# Altium PCB PCB1.PcbDoc
Units mm, origin at the board's own origin, x right, y up, seen from the top; angles counter-clockwise.
Board outline 42.5 x 32.75 mm, 4 copper layers (Top Layer, Int1 (GND), Int2 (PWR), Bottom Layer), stack 1.57 mm thick; 35 components, 26 nets, 170 pads, 29 vias.
Unrouted connection lines stored in the file: 88.
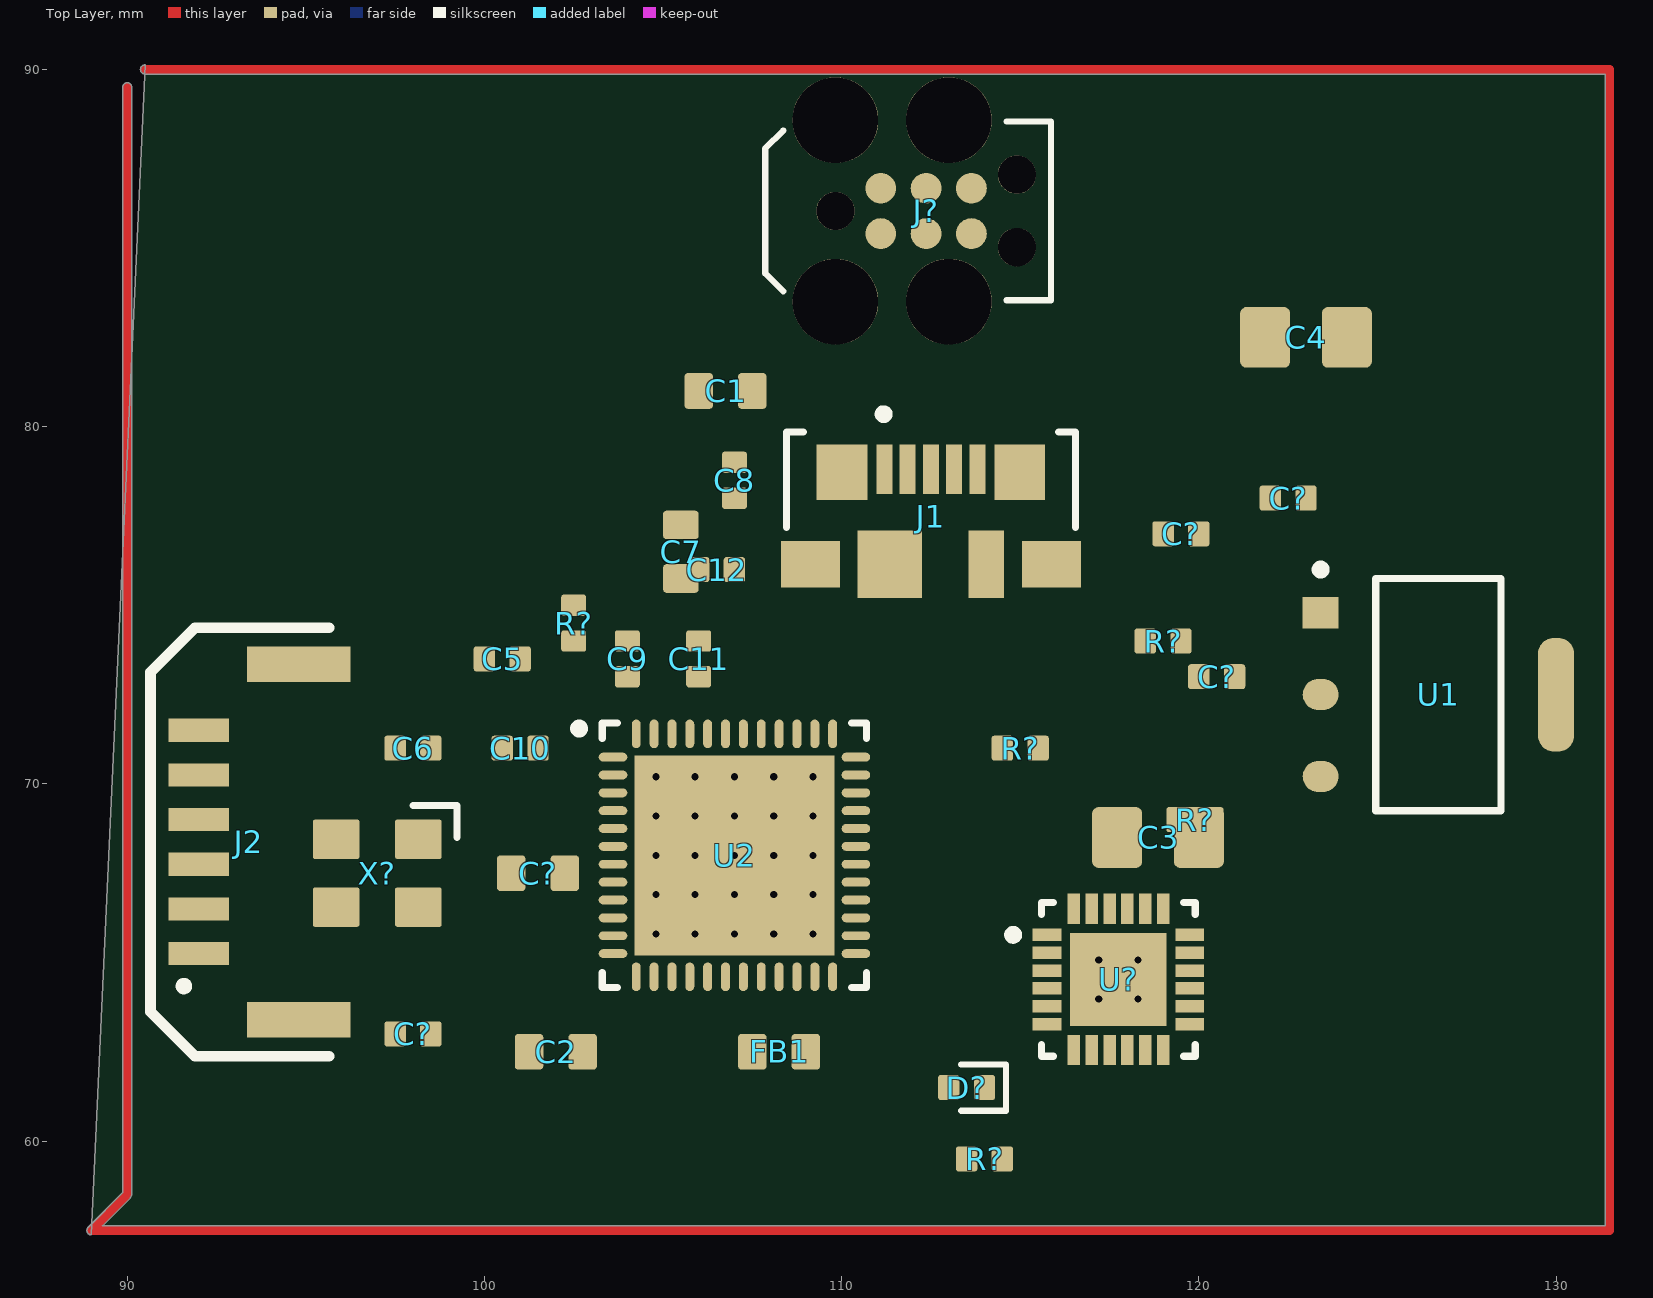
[diagram p0: Top Layer view]
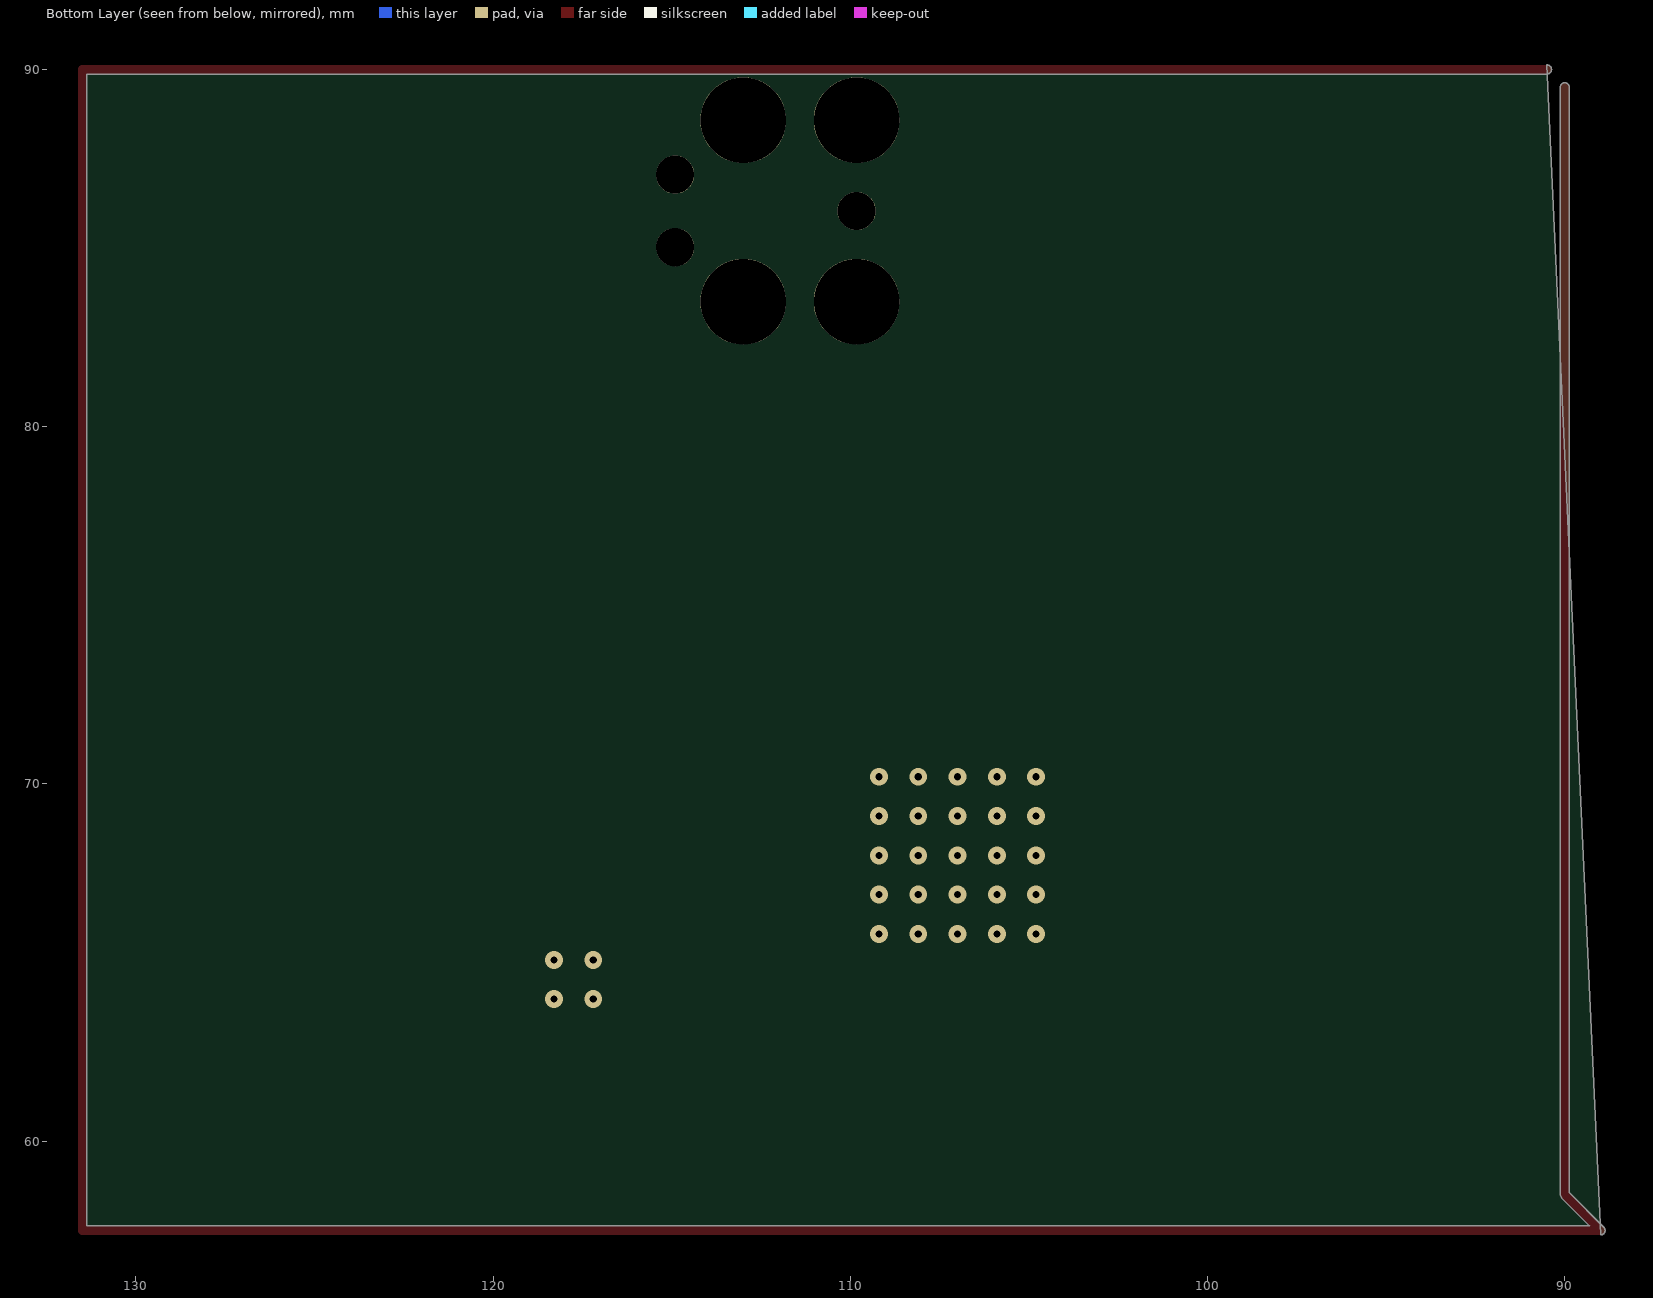
[diagram p1: Bottom Layer view, seen from below]

## Layer stack, top to bottom
Top Solder: solder mask 0.0254, SM-001, Dk 4
Top Layer: signal copper 0.035
Dielectric 1: prepreg 0.2, PP-017, Dk 4.6
Int1 (GND): signal copper 0.0175
Dielectric 3: core 1.065, Core-039, Dk 4.6
Int2 (PWR): signal copper 0.0175
Dielectric 5: prepreg 0.2, PP-017, Dk 4.6
Bottom Layer: signal copper 0.035
Bottom Solder: solder mask 0.0254, SM-001, Dk 4

## Board outline
89,57.373 cw(c89,57.5) 88.91,57.59 89.873,58.553 89.873,89.5 cw(c90,89.5) 90.127,89.5 90.127,58.5 90.09,58.41 89.308,57.627 131.373,57.627 131.373,89.873 90.5,89.873 cw(c90.5,90) 90.5,90.127

## Design rules (kind name [scope] priority, off if disabled: settings)
Clearance [All] p1: gap=0.2 ignorepadtopadclearanceinfootprint=FALSE
DiffPairsRouting [All] p1: maxlimit=0.254 minlimit=0.254 mostfreqgap=0.254 toplayer_minwidth=0.381 toplayer_maxwidth=0.381 toplayer_prefwidth=0.381 midlayer1_minwidth=0.381 midlayer1_maxwidth=0.381 midlayer1_prefwidth=0.381 midlayer2_minwidth=0.381 midlayer2_maxwidth=0.381 midlayer2_prefwidth=0.381 bottomlayer_minwidth=0.381 bottomlayer_maxwidth=0.381 bottomlayer_prefwidth=0.381 maxuncoupledlength=12.7
PolygonConnect [All] p1: connectstyle=Direct reliefconductorwidth=0.254 reliefentries=4 polygonreliefangle="90 Angle" airgapwidth=0.254
RoutingVias [All] p1: holewidth=0.711 width=1.27 viastyle="Through Hole" minholewidth=0.711 minwidth=1.27 maxholewidth=0.711 maxwidth=1.27
SolderMaskExpansion [All] p1: expansion=0 istentingtop=FALSE
SupplyNets "Schematic Supply Nets_4" [InNet('N000-1')] p1: voltage=0.000
SupplyNets "Schematic Supply Nets_3" [InNet('VCC')] p2: voltage=0.000
SupplyNets "Schematic Supply Nets_2" [InNet('GND')] p3: voltage=0.000
SupplyNets "Schematic Supply Nets_1" [InNet('+5')] p4: voltage=0.000
SupplyNets "Schematic Supply Nets" [InNet('3V3')] p5: voltage=0.000
UnRoutedNet [All] p1: checkbadconnections=TRUE
Width [All] p1: maxlimit=1 minlimit=0.2 preferedwidth=0.3 midlayer1_minwidth=0.254 midlayer1_maxwidth=0.254 midlayer1_prefwidth=0.254 midlayer2_minwidth=0.254 midlayer2_maxwidth=0.254 midlayer2_prefwidth=0.254 minimp=50.000000 maximp=50.000000 favimp=50.000000
28 further rules are at their usual default settings.

## Classes and differential pairs
differential pair USB_D: +USB_D_P -USB_D_N

## Components (designator, comment, footprint, x,y, rotation, side; value= is the part's Value field where it differs from the comment)
C1 "2u2" CAP_0603 106.75,81 r0 top
C2 "2u2" CAP_0603 102,62.5 r0 top
C3 "22u" CAP_0805 118.857,68.5 r0 top
C4 "22u" CAP_0805 123,82.5 r0 top
C5 "10P" CAP_0402 100.5,73.5 r0 top
C6 "10p" CAP_0402 98,71 r0 top
C7 "2u2" CAP_0603 105.5,76.5 r270 top
C8 "100n" CAP_0402 107,78.5 r90 top
C9 "100n" CAP_0402 104,73.5 r90 top
C10 "100n" CAP_0402 101,71 r0 top
C11 "100n" CAP_0402 106,73.5 r90 top
C12 "100n" CAP_0402 106.5,76 r180 top
C? "100n" CAP_0402 98,63 r0 top
C? "100n" CAP_0402 150.719,39.789 r0 top
C? "100n" CAP_0402 119.5,77 r0 top
C? "2u2" CAP_0603 101.5,67.5 r0 top
C? "10n" CAP_0402 122.5,78 r0 top
C? "2n2" CAP_0402 120.5,73 r0 top
D1 "GREEN" LED_0402_GREEN 160,54.5 r0 top
D? "RED" LED_0402_RED 113.5,61.5 r0 top
FB1 "120R" FB_0603 108.25,62.5 r0 top
J1 "473460001" FP-473460001-MFG 112.5,76.5 r0 top
J2 "SM06B-GHS-TB" SM06B-GHS-TB 93.4,68.375 r90 top
J? "TC2030" TC2030-FP 112.365,86.04 r0 top
R1 "1K" RES_0402 163.5,84 r0 top
R? "2K2" RES_0402 115,71 r0 top
R? "2K2" RES_0402 124.684,39.789 r0 top
R? "1K" RES_0402 119.889,69 r0 top
R? "10k" RES_0402 114,59.5 r0 top
R? "10k" RES_0402 119,74 r0 top
R? "0R" RES_0402 102.5,74.5 r90 top
U1 "AMS1117-3.3" FP-AMS1117-IPC_C 126.705,72.5 r0 top
U2 "STM32F411CEU6" STM-UFQFPN48_L 107,68 r0 top
U? "MPU-6050" IS-QFN-24_V 117.75,64.525 r0 top
X? "24MHz" XTAL_3225 97,67.5 r180 top

## Footprints (in the part's own frame and the unit in brackets; to place one, negate y for a bottom-side part, rotate by r counter-clockwise, add the part's x,y. Pads: shape width x height; smd on the part's side, far side on the other; paste and mask are expansions set on the pad)
CAP_0402 [mm]
  rrect25% 0.6x0.7 smd: 1(-0.5,0) 2(0.5,0)
  body extent -0.5,-0.26 0.5,0.26, height 0.37
CAP_0603 [mm]
  rrect25% 0.8x1 smd: 1(-0.75,0) 2(0.75,0)
  body extent -0.8,-0.4 0.8,0.4, height 0.51
CAP_0805 [mm]
  rrect25% 1.4x1.7 smd: 1(-1.143,0) 2(1.143,0)
  body extent -1.15,-0.76 1.15,0.79, height 1.01
FB_0603 [mm]
  rrect25% 0.8x1 smd: 1(-0.75,0) 2(0.75,0)
  body extent -0.8,-0.4 0.8,0.4, height 0.81
FP-473460001-MFG [mm]
  rect 0.45x1.38 smd paste+0 mask+0: 1(-1.3,2.31) 2(-0.65,2.31) 3(0,2.31) 4(0.65,2.31) 5(1.3,2.31)
  rect 1.425x1.55 smd paste+0 mask+0: 6(-2.488,2.225) 7(2.488,2.225)
  rect 1.65x1.3 smd paste+0 mask+0: 8(-3.375,-0.35) 11(3.375,-0.35)
  rect 1.8x1.9 smd paste+0 mask+0: 9(-1.15,-0.35)
  rect 1x1.9 smd paste+0 mask+0: 10(1.55,-0.35)
  silkscreen extent -4.05,0.67 4.05,3.97, body extent -4.3,-2.48 4.3,3.45, height 0.25
FP-AMS1117-IPC_C [mm]
  rect 1.004x0.872 smd paste+0 mask+0: 1(-3.295,2.29)
  rrect100% 1.004x0.872 smd paste+0 mask+0: 2(-3.295,0) 3(-3.295,-2.29)
  rrect87% 1.004x3.182 smd paste+0 mask+0: 4(3.295,0)
  silkscreen extent -3.42,-3.25 1.75,3.62, body extent -3.9,-3.35 3.9,3.35, height 0.25
IS-QFN-24_V [mm] "QFN, 24-Leads, Body 4x4mm, Pitch 0.5mm, Thermal Pad 2.7x2.6mm"
  rect 0.8x0.35 smd: 1(-2,1.25) 2(-2,0.75) 3(-2,0.25) 4(-2,-0.25) 5(-2,-0.75) 6(-2,-1.25) 13(2,-1.25) 14(2,-0.75) 15(2,-0.25) 16(2,0.25) 17(2,0.75) 18(2,1.25)
  rect 0.35x0.85 smd mask+0.102: 7(-1.25,-1.975) 8(-0.75,-1.975) 9(-0.25,-1.975) 10(0.25,-1.975) 11(0.75,-1.975) 12(1.25,-1.975) 19(1.25,1.975) 20(0.75,1.975) 21(0.25,1.975) 22(-0.25,1.975) 23(-0.75,1.975) 24(-1.25,1.975)
  rect 2.7x2.6 smd: 25(0,0)
  silkscreen extent -3.07,-2.15 2.15,2.15, body extent -2,-2 2,2, height 0.95
LED_0402_GREEN [mm]
  rrect25% 0.6x0.7 smd: A(-0.5,0) K(0.5,0)
  silkscreen extent -0.15,-0.65 1.1,0.65, body extent -0.51,-0.25 0.51,0.25, height 0.45
LED_0402_RED [mm]
  rrect25% 0.6x0.7 smd: A(-0.5,0) K(0.5,0)
  silkscreen extent -0.15,-0.65 1.1,0.65, body extent -0.51,-0.25 0.51,0.25, height 0.45
RES_0402 [mm]
  rrect25% 0.6x0.7 smd: 1(-0.5,0) 2(0.5,0)
  body extent -0.5,-0.25 0.5,0.25, height 0.3
SM06B-GHS-TB [mm]
  rect 0.65x1.7 smd: 1(-3.125,1.4) 2(-1.875,1.4) 3(-0.625,1.4) 4(0.625,1.4) 5(1.875,1.4) 6(3.125,1.4)
  rect 1x2.9 smd: ""(-4.975,-1.4) ""(4.975,-1.4)
  silkscreen extent -6,-2.25 6,2.75, body extent -5.38,-2.8 5.38,2.05, height 4.26
STM-UFQFPN48_L [mm] "QFN, 48-Leads, Body 7.1x7.1mm, Pitch 0.5mm, Thermal Pad 5.6x5.6mm, IPC High Density"
  oval 0.8x0.25 smd: 1(-3.4,2.75) 2(-3.4,2.25) 3(-3.4,1.75) 4(-3.4,1.25) 5(-3.4,0.75) 6(-3.4,0.25) 7(-3.4,-0.25) 8(-3.4,-0.75) 9(-3.4,-1.25) 10(-3.4,-1.75) 11(-3.4,-2.25) 12(-3.4,-2.75) 25(3.4,-2.75) 26(3.4,-2.25) 27(3.4,-1.75) 28(3.4,-1.25) 29(3.4,-0.75) 30(3.4,-0.25) 31(3.4,0.25) 32(3.4,0.75) 33(3.4,1.25) 34(3.4,1.75) 35(3.4,2.25) 36(3.4,2.75)
  oval 0.25x0.8 smd: 13(-2.75,-3.4) 14(-2.25,-3.4) 15(-1.75,-3.4) 16(-1.25,-3.4) 17(-0.75,-3.4) 18(-0.25,-3.4) 19(0.25,-3.4) 20(0.75,-3.4) 21(1.25,-3.4) 22(1.75,-3.4) 23(2.25,-3.4) 24(2.75,-3.4) 37(2.75,3.4) 38(2.25,3.4) 39(1.75,3.4) 40(1.25,3.4) 41(0.75,3.4) 42(0.25,3.4) 43(-0.25,3.4) 44(-0.75,3.4) 45(-1.25,3.4) 46(-1.75,3.4) 47(-2.25,3.4) 48(-2.75,3.4)
  rect 5.6x5.6 smd: 49(0,0)
  silkscreen extent -4.47,-3.7 3.7,3.7, body extent -3.55,-3.55 3.55,3.55, height 0.6
TC2030-FP [mm]
  round 0.863 smd paste-0.432: 1(-1.27,-0.635) 2(-1.27,0.635) 3(0,-0.635) 4(0,0.635) 5(1.27,-0.635) 6(1.27,0.635)
  round 2.4 hole 2.4 unplated: MH(-2.54,-2.54) MH(-2.54,2.54) MH(0.635,-2.54) MH(0.635,2.54)
  round 1.067 hole 1.067 unplated: MH(-2.54,0) MH(2.54,-1.016) MH(2.54,1.016)
  silkscreen extent -4.5,-2.5 3.5,2.5
XTAL_3225 [mm]
  rrect10% 1.3x1.1 smd: 1(-1.15,-0.95) 2(1.15,-0.95) 3(1.15,0.95) 4(-1.15,0.95)
  silkscreen extent -2.23,-1.89 -1,-1, body extent -1.6,-1.28 1.6,1.22, height 0.61

## Part data
C1 C2 C7 C?: library part CAP_0603, "Capacitor SMD 0603"
C3 C4: library part CAP_0805, "Capacitor SMD 0805"
C5 C6 C8 C9 C10 C11 C12 C? C? C? C? C?: library part CAP_0402, "Capacitor SMD 0402"
D1: library part LED_0402_GREEN, "LED 0402 GREEN SMD"
D?: library part LED_0402_RED, "LED 0402 RED SMD"
FB1: library part FB_0603, "Ferrite Bead SMD 0603"
J1: library part CMP-2000-05246-2, "CONN RCPT USB2.0 MICRO B SMD R/A", Current Rating=1.8A, Manufacturer=Molex, Package=0, Temperature="-30°C to +85°C", Temperature Range High=+85°C, Temperature Range Low=-30°C, Voltage Rating=30V, Automotive=No, Category=Conn, ComponentLink2Description=Datasheet, ComponentLink2URL=https://www.molex.com/webdocs/datasheets/pdf/en-us/0473460001_IO_CONNECTORS.pdf, Conn Orientation="Right Angle", Contact Material=Gold,Nickel, Device Class L1=Connectors, Device Class L2="USB Connectors", Device Class L3=unset, Digikey Description="CONN RCPT USB2.0 MICRO B SMD R/A", Footprint Url=https://www.molex.com/pdm_docs/sd/473460001_sd.pdf, Height=2.945mm, Is Female=yes, Lead Free=Yes, Manufacturer Part Number=473460001, Number Of Contacts=5, Octopart=https://octopart.com/47346-0001-molex-7164928, Pitch=0.65mm, RoHS=TRUE, Shielding=true, Usb Standard="USB 2.0"
J2: "Header Connector 6 Position 1.25MM Pitch SMD Horizontal JST GH", Manufacturer=JST, Manufacturer Part Number=SM06B-GHS-TB
J?: "Tag-Connect No-Solder SWD Debug Connector DO NOT PLACE", Manufacturer=Tag-Connect, Manufacturer Part Number=TC2030
R1 R? R? R? R? R? R?: library part RES_0402, "Resistor SMD 0402"
U1: library part CMP-209535-000001-1, "LDO Voltage Regulators 1A, 3.3V", Dropout Voltage=1.1V, Manufacturer="Advanced Monolithic Systems", Max Junction Temp=+125°C, Max Power Dissipation=1.2W, Max Supply Voltage=15V, Nominal Supply Current=5mA, Output Current=1A, Output Voltage=3.3V, Package=AMS1117, Temperature="-40°C to +125°C", Temperature Range Low=-40°C, Automotive=No, Category=IC, ComponentLink2Description=Datasheet, ComponentLink2URL=http://www.advanced-monolithic.com/pdf/ds1117.pdf, Device Class L1="Integrated Circuits (ICs)", Device Class L2="Power Management ICs", Device Class L3="Voltage Regulators - Linear", Height=1.8mm, Ipc Land Pattern Name=SOT229P700X180-4, Lead Free=Yes, Manufacturer Part Number=AMS1117-3.3, Number Of Outputs=1, Octopart=https://octopart.com/ams1117-3.3-advanced+monolithic+systems-25899300, Output Type=Fixed, RoHS=TRUE, Standoff Height=0.64mm, Temperature Range High=+125°C
U2: library part CMP-0243-00165-1, "ARM Cortex-M4 32-bit MCU+FPU, 512 KB Flash, 128 KB RAM, 36 I/Os, 48-Pin UFQFPN, -40 to 85 degC, Tray", I/Os (High Current)=36, Operating Frequency(F) (Processor speed) (MHz)=100, Package Description=UFQFPN48, Package Reference="48-Pin Ultra Thin Fine Pitch Quad Flat No-Lead, 7 x 7 x 0.6 mm Body, 0.5 mm Pitch, Exposed Pad", Supply Voltage(Vcc) min (V)=1.7, ComponentLink1Description="Manufacturer URL", ComponentLink1URL=http://www.st.com/, ComponentLink2Description=Datasheet, ComponentLink2URL=http://www.st.com/st-web-ui/static/active/en/resource/technical/document/datasheet/DM00115249.pdf, Core="ARM Cortex-M4", DatasheetVersion="Rev. 6", FLASH Size (Prog) (kB)=512, Internal RAM Size (kB)=128, Mounting Technology="Surface Mount", Packing=Tray
U?: library part CMP-1753-00002-2, "3-Axis Gyroscope, Accelerometer and a Digital Motion Processor(TM) (DMP), 2.375 to 3.46 V, -40 to 85 degC, 24-Pin QFN, RoHS, Tape and Reel", Manufacturer=InvenSense, Standard Package=5,000, Category=Sensors,Transducers, Datasheet URL=http://datasheet.octopart.com/MPU-6050-InvenSense-datasheet-14421344.pdf, Datasheet Version="Rev. 3.3, 05/2012", Dynamic Catalog=MPU-6000™Series, Family=Multifunction, Featured Product=MPU-60506-Axis,IntegratedI²CSolution, Manufacturer URL=http://www.invensense.com/, Online Catalog=MPU-6000™Series, Other Names="1428-1007-2 / MPU6050", Output Type=Digital, Sensor Type=MotionTracking, Unit PriceUSD=Digital
X?: library part TSX-3225_24.0000MF15X-AC, "Crystal SMD 24MHz 10PPM 7pF 3225", Manufacturer=Epson, Manufacturer Part Number="TSX-3225 24.0000MF15X-AC"

## Via types
v1: diameter 0.5, hole 0.2, Top Layer to Bottom Layer, 29 vias

## Nets (pads, with @x,y where several pads share a name; then routed paths per layer and width w, separated by ;. In a path a pad name is that pad's centre, name@x,y a point inside that pad or via, vN(x,y) a via of type N, cw(c..) or ccw(c..) an arc to the next point about the centre after c; other vN are vias at no path point)
3V3: C4.2 C7.1 C8.2 C9.2 C10.2 C11.2 C12.2 C?.2@123,78 C?.2@151.219,39.789 J2.1 J?.1 R?.2@114.5,59.5 R?.2@115.5,71 R?.2@125.184,39.789 U1.2 U1.4 U2.1 U2.9 U2.24 U2.36 U2.48 U?.8 U?.13 | length 66.1
  Top Layer w0.3: 74,59.5 75.92,59.5 80.1,63.68 80.1,73.463 80.637,74 82.063,74 82.35,74.287 82.35,76.951 82.699,77.3 84.901,77.3 85.25,77.649 85.25,78.301 85.599,78.65 85.65,78.65 86,79 ; R?.2@125.184,39.739 125.834,39.089 150.62,39.089 150.869,39.338 150.869,39.389 151.219,39.739 C?.2@151.219,39.789 ; R?.2@125.184,39.789 125.184,39.839 130.5,45.155 130.5,48.599 130.324,48.775 130.176,48.775 130,48.951 130,48.955
+5: C2.1 FB1.2
GND: C1.2 C2.2 C3.1 C4.1 C5.1 C6.1 C7.2 C8.1 C9.1 C10.1 C11.1 C12.1 C?.1@97.5,63 C?.1@119,77 C?.1@120,73 C?.1@122,78 C?.1@150.219,39.789 C?.2@102.25,67.5 J1.5 J?.5 R1.1 R?.1@118.5,74 R?.1@119.389,69 U1.1 U2.8 U2.23 U2.35 U2.47 U2.49 U?.1 U?.9 U?.11 U?.18 U?.25 X?.2 X?.4 | length 31.7
  Top Layer w0.3: 133.5,50.775 133.5,50.676 133.676,50.5 139.508,50.5 150.019,39.989 150.069,39.989 150.219,39.839 C?.1@150.219,39.789 ; 156.864,76.17 156.864,77.814 163,83.95 R1.1
  other v1: 117.2,63.975 118.3,63.975 117.2,65.075 118.3,65.075 104.8,65.8 105.9,65.8 107,65.8 108.1,65.8 109.2,65.8 104.8,66.9 105.9,66.9 107,66.9 108.1,66.9 109.2,66.9 104.8,68 105.9,68 107,68 108.1,68 109.2,68 104.8,69.1 105.9,69.1 107,69.1 108.1,69.1 109.2,69.1 104.8,70.2 105.9,70.2 107,70.2 108.1,70.2 109.2,70.2
IMU-INT: U2.45 U?.12
IMU_SCL: R?.1@124.184,39.789 U2.42 U?.23 | length 17.5
  Top Layer w0.3: R?.1@124.184,39.789 124.184,49.279 129.18,54.275 129.82,54.275 130,54.095
IMU_SDA: R?.1@114.5,71 U2.43 U?.24
MCU_NRST: C?.2@98.5,63 J?.3 R?.1@113.5,59.5 U2.7
MCU_PA4: J2.2 U2.14
MCU_PA5: J2.3 U2.15
MCU_PA6: J2.4 U2.16
MCU_PA7: J2.5 U2.17
MCU_SWCLK: J?.4 U2.37
MCU_SWDIO: J?.2 U2.34
MCU_SWO: J?.6 U2.39
NetC3_2: C3.2 U1.3
NetC5_2: C5.2 U2.5 X?.1
NetC6_2: C6.2 R?.1@102.5,74 X?.3
NetC?_1: C?.1@100.75,67.5 U2.22
NetC?_2: C?.2@121,73 U?.20 | length 30.7
  Top Layer w0.3: 131.5,54.095 142.121,64.716 142.201,64.716 152.823,75.338 152.823,75.389 153.173,75.739 153.173,75.789
NetD1_K: D1.K R1.2 | length 30.9
  Top Layer w0.3: D1.K 160.5,54.55 164,58.05 R1.2
NetD?_A: D?.A U2.26
NetD?_K: D?.K R?.2@120.389,69
NetR?_2: R?.2@119.5,74 U2.44
USB_D_N: J1.2 U2.32
USB_D_P: J1.3 U2.33
VCC: C1.1 FB1.1 J1.1
pads on no net: C?.2@120,77 D1.A J1.4 J1.6 J1.7 J1.8 J1.9 J1.10 J1.11 J2. J2.6 J?.MH R?.2@102.5,75 U2.2 U2.3 U2.4 U2.6 U2.10 U2.11 U2.12 U2.13 U2.18 U2.19 U2.20 U2.21 U2.25 U2.27 U2.28 U2.29 U2.30 U2.31 U2.38 U2.40 U2.41 U2.46 U?.2 U?.3 U?.4 U?.5 U?.6 U?.7 U?.10 U?.14 U?.15 U?.16 U?.17 U?.19 U?.21 U?.22
copper on no net: | length 477.8
  Top Layer w0.254: 62.5,30 63.5,31 ; 69.5,102.5 169,102.5 169,36.5 167.5,38 72.5,38 70.5,40 70.5,102.5 ; 90,89.5 90,58.5 89,57.5 131.5,57.5 131.5,90 90.5,90

## Text inside footprints (layer, text, board x,y; h text height)
D1: Mechanical 13 "+" at 158.117,55.008 h0.5
D?: Mechanical 13 "+" at 111.617,62.008 h0.5